# Altium PCB PCB1.PcbDoc
Units mil, origin at the board's own origin, x right, y up, seen from the top; angles counter-clockwise.
Board outline 6000 x 4000 mil, 2 copper layers (Top Layer, Bottom Layer); 21 components, 16 nets, 62 pads, 0 vias.
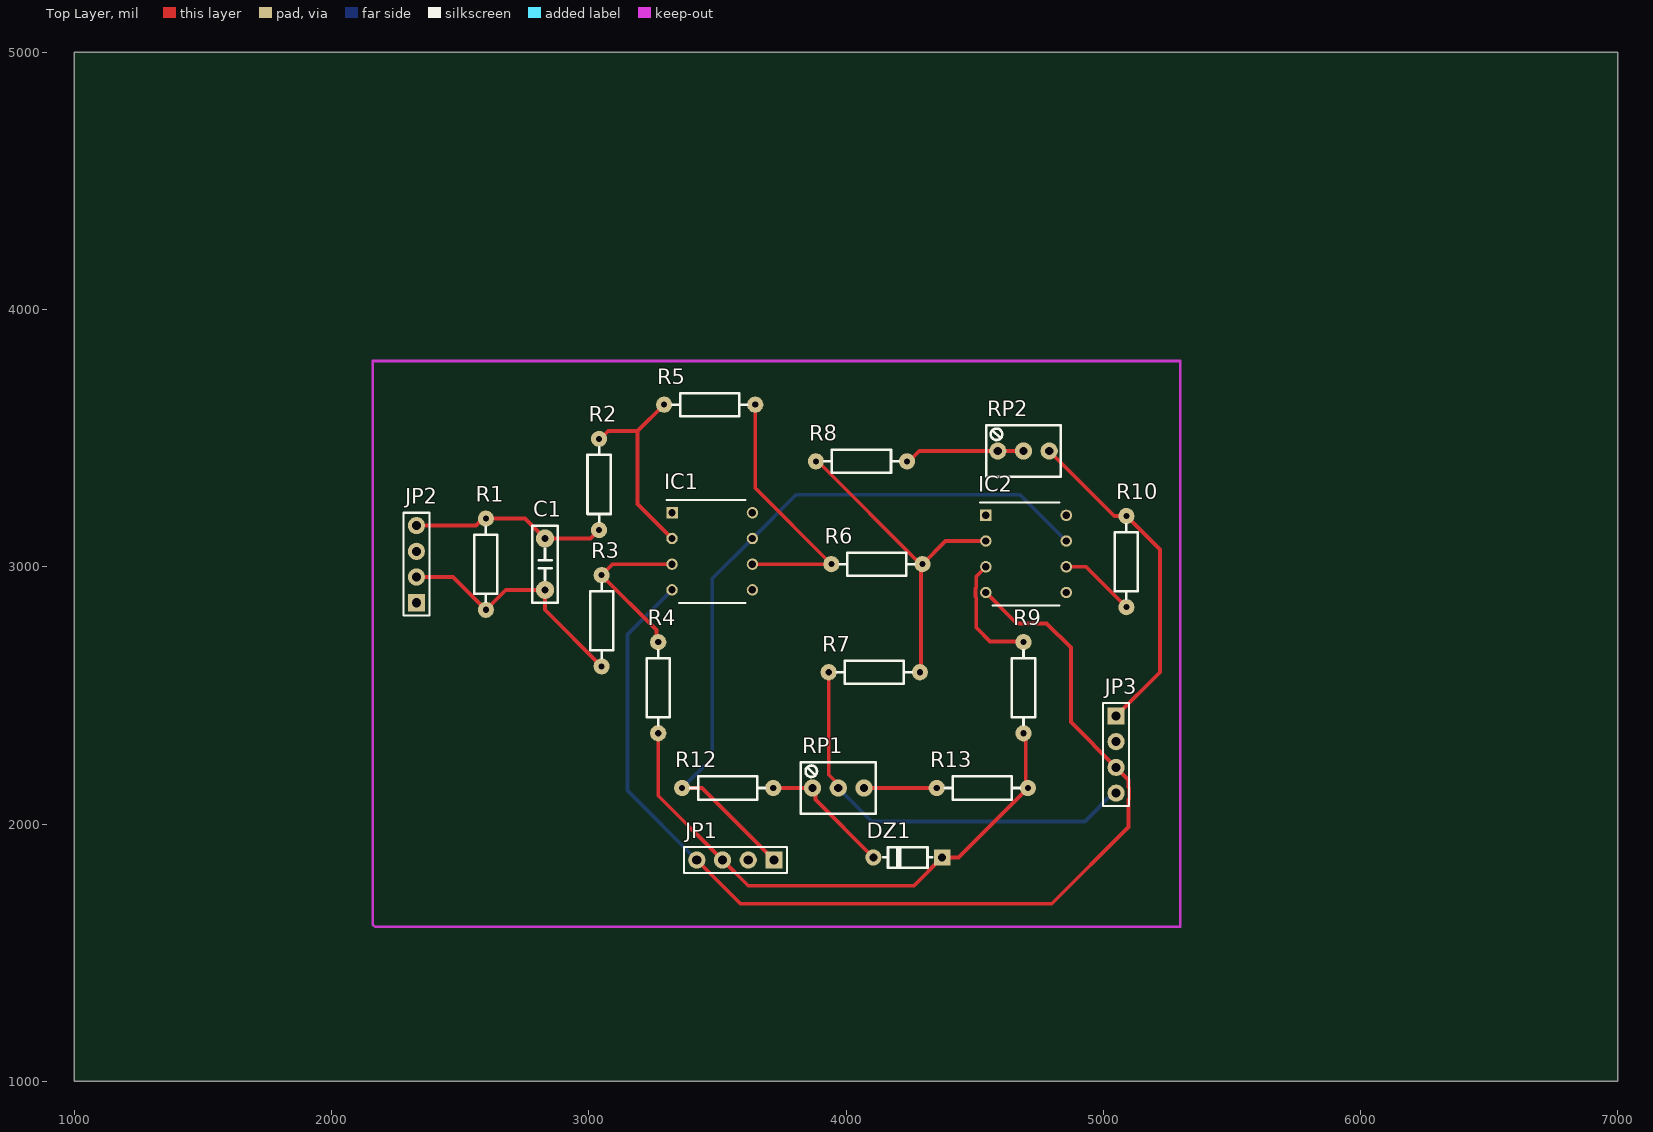
[diagram p0: Top Layer view]
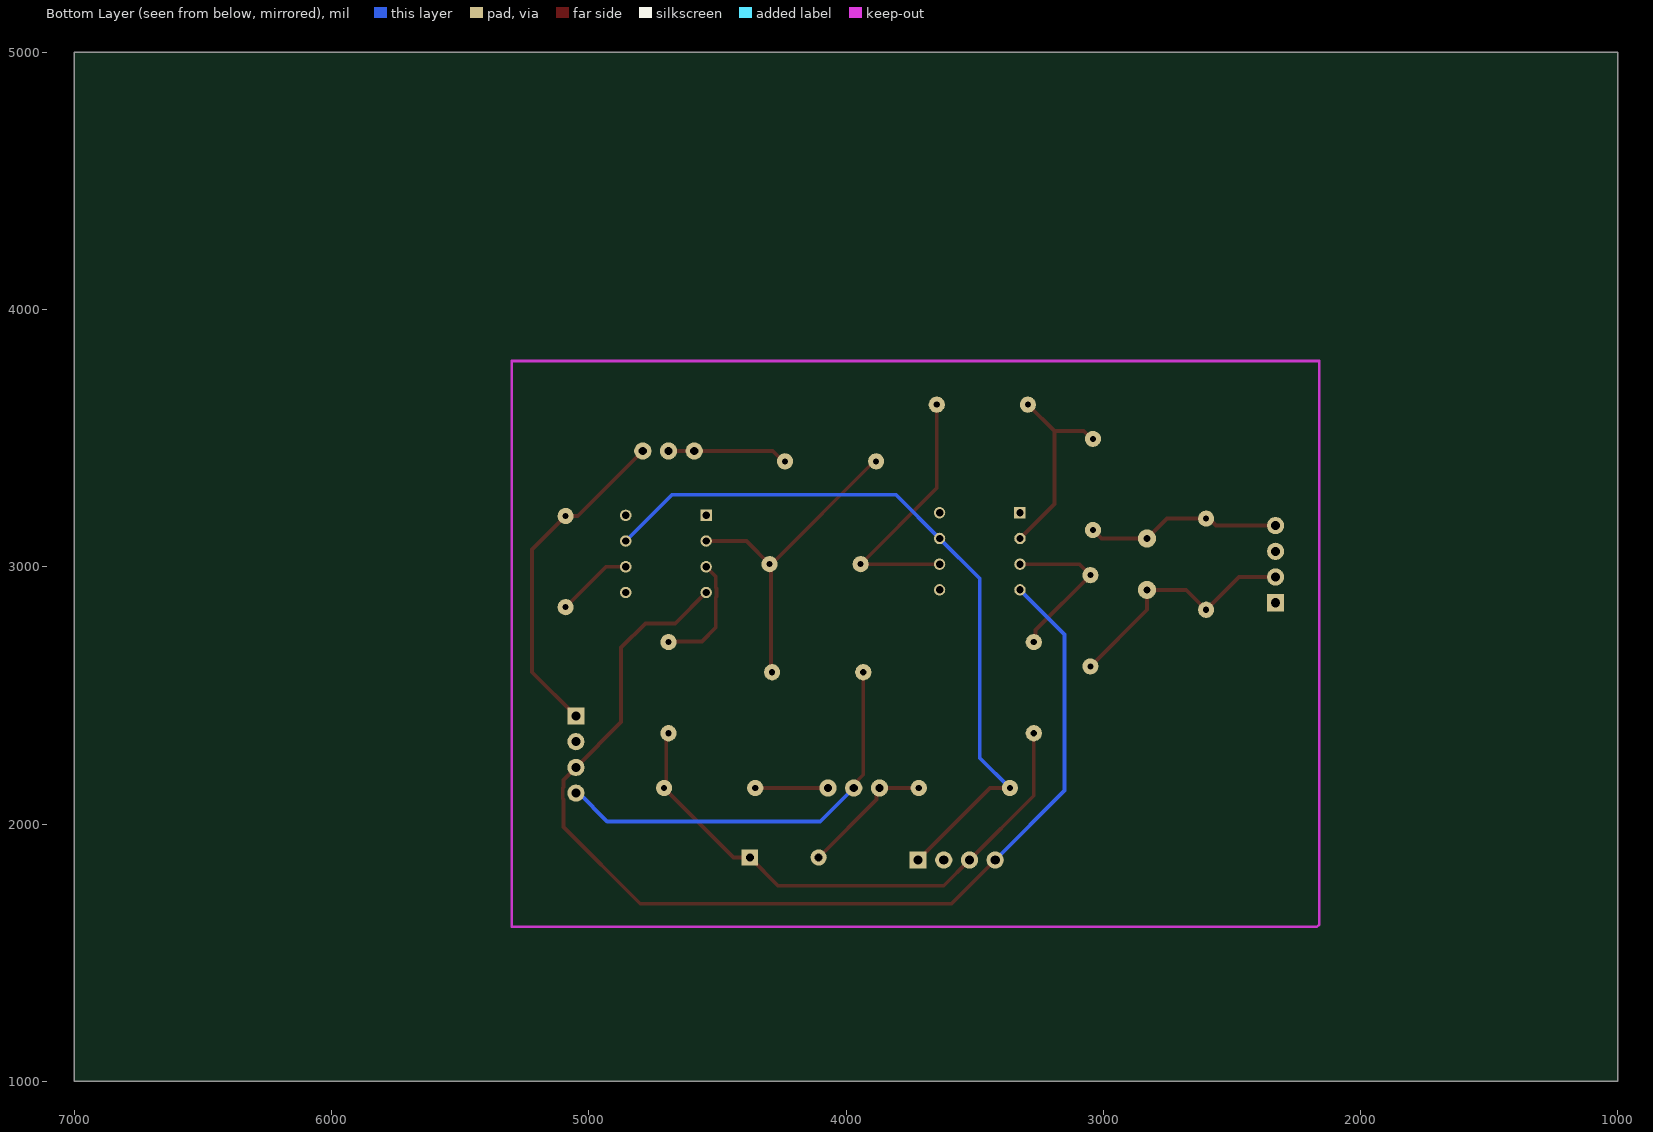
[diagram p1: Bottom Layer view, seen from below]

## Layer stack, top to bottom
Top Solder: solder mask 0.4, Solder Resist, Dk 3.5
Top Layer: signal copper 1.4
Dielectric 1: dielectric 12.6, FR-4, Dk 4.8
Bottom Layer: signal copper 1.4
Bottom Solder: solder mask 0.4, Solder Resist, Dk 3.5

## Board outline
1000,1000 7000,1000 7000,5000 1000,5000

## Design rules (kind name [scope] priority, off if disabled: settings)
Clearance [All] p1: gap=10 ignorepadtopadclearanceinfootprint=FALSE except(0: Arc-Hole Track-Hole SMDPad-Hole THPad-Hole Via-Hole Fill-Hole Poly-Hole Region-Hole Text-Hole)
PolygonConnect [All] p1: connectstyle=Relief reliefconductorwidth=10 reliefentries=4 polygonreliefangle="90 Angle" airgapwidth=10
RoutingVias [All] p1: holewidth=28 width=50 viastyle="Through Hole" minholewidth=28 minwidth=50 maxholewidth=28 maxwidth=50
SolderMaskExpansion [All] p1: expansion=4 istentingtop=FALSE
Width [All] p1: maxlimit=50 minlimit=10 preferedwidth=15 minimp=50.000000 maximp=50.000000 favimp=50.000000
30 further rules are at their usual default settings.

## Components (designator, comment, footprint, x,y, rotation, side; value= is the part's Value field where it differs from the comment)
C1 "224" MLCC5.08-A 2830,3010 r90 top
DZ1 "1N4619" DO-35 4240,1870 r180 top
IC1 "OP07CP+" DIP794W53P254L959H508Q8N 3480,3060 r0 top
IC2 "OP07CP+" DIP794W53P254L959H508Q8N 4700,3050 r0 top
JP1 "HDR-1X4" HDR2.54-LI-4P 3570,1860 r180 top
JP2 "HDR-1X4" HDR2.54-LI-4P 2330,3010 r90 top
JP3 "HDR-1X4" HDR2.54-LI-4P 5050,2270 r270 top
R1 "1K" "RS 1/4W" 2600,3010 r90 top
R2 "1K" "RS 1/4W" 3040,3320 r90 top
R3 "1K" "RS 1/4W" 3050,2790 r90 top
R4 "1K" "RS 1/4W" 3270,2530 r90 top
R5 "1K" "RS 1/4W" 3470,3630 r0 top
R6 "1K" "RS 1/4W" 4120,3010 r0 top
R7 "1K" "RS 1/4W" 4110,2590 r0 top
R8 "1K" "RS 1/4W" 4060,3410 r0 top
R9 "1K" "RS 1/4W" 4690,2530 r90 top
R10 "1K" "RS 1/4W" 5090,3020 r90 top
R12 "1K" "RS 1/4W" 3540,2140 r0 top
R13 "1K" "RS 1/4W" 4530,2140 r180 top
RP1 "10K" 3266Y 3970,2140 r0 top
RP2 "12K" 3266Y 4690,3450 r0 top

## Footprints (in the part's own frame and the unit in brackets; to place one, negate y for a bottom-side part, rotate by r counter-clockwise, add the part's x,y. Pads: shape width x height; smd on the part's side, far side on the other; paste and mask are expansions set on the pad)
3266Y [mm] "长：7mm，宽：4.8mm，高：7.5mm"
  round 1.7 hole 0.8: 1(-2.54,0) 2(0,0) 3(2.54,0)
  silkscreen extent -3.68,-2.54 3.68,2.54, body extent -3.5,-2.4 3.5,2.4, height 8.03
DIP794W53P254L959H508Q8N [mm]
  rect 1.13x1.13 hole 0.73: 1(-3.97,3.81)
  round 1.13 hole 0.73: 2(-3.97,1.27) 3(-3.97,-1.27) 4(-3.97,-3.81) 5(3.97,-3.81) 6(3.97,-1.27) 7(3.97,1.27) 8(3.97,3.81)
  silkscreen extent -4.53,-5.08 3.3,5.08, body extent -4.1,-4.79 4.1,4.79, height 5.08
DO-35 [mm] "1.8*6.8mm(直径，脚距）"
  rect 1.6x1.6 hole 0.8: 1(-3.4,0)
  round 1.6 hole 0.8: 2(3.4,0)
  silkscreen extent -2.41,-1.02 2.41,1.02, body extent -3.65,-0.9 3.65,0.9, height 1.85
HDR2.54-LI-4P [mm] "排针，4脚"
  rect 1.7x1.7 hole 0.9: 1(-3.81,0)
  round 1.7 hole 0.9: 2(-1.27,0) 3(1.27,0) 4(3.81,0)
  silkscreen extent -5.08,-1.27 5.08,1.27, body extent -5.08,-1.27 5.08,1.27, height 8.5
MLCC5.08-A [mm] "独石电容，脚距5.08mm"
  round 1.8 hole 0.7: 1(-2.54,0) 2(2.54,0)
  silkscreen extent -3.81,-1.27 3.81,1.27, body extent -2.79,-1 2.79,1, height 3.71
"RS 1/4W" [mm] "直插色环电阻，脚距9mm，直径2.3mm"
  round 1.6 hole 0.6: 1(-4.5,0) 2(4.5,0)
  silkscreen extent -3.68,-1.14 3.68,1.14, body extent -4.72,-1.16 4.73,1.16, height 2.32

## Part data
C1: library part C-MLCC, "独石电容", BOM名称=独石电容, 学习资源=www.ooocke.com, 版权归属=源创客
DZ1: "3V/0.5W稳压管", BOM名称=3V/0.5W稳压管, 学习资源=www.ooocke.com, 版权归属=源创客
IC1 IC2: "Integrated Circuit", Manufacturer_Name="Texas Instruments", Mouser Part Number=N/A, Height=5.08mm, Manufacturer_Part_Number=OP07CP+, Mouser Price/Stock=https://www.mouser.co.uk/ProductDetail/Texas-Instruments/OP07CP%2b?qs=iZ8gpeFYjbuxAroH12iSPg%3D%3D
JP1 JP2 JP3: library part "Header 4", "4P接插件", BOM名称=4P接插件, 学习资源=www.ooocke.com, 版权归属=源创客
R1 R2 R3 R4 R5 R6 R7 R8 R9 R10 R12 R13: library part R-CRR, "直插色环电阻", BOM名称=色环电阻, 学习资源=www.ooocke.com, 版权归属=源创客
RP1 RP2: library part RP-ID, "插件单联电位器", BOM名称=插件电位器, 学习资源=www.ooocke.com, 版权归属=源创客

## Nets (pads, with @x,y where several pads share a name; then routed paths per layer and width w, separated by ;. In a path a pad name is that pad's centre, name@x,y a point inside that pad or via, vN(x,y) a via of type N, cw(c..) or ccw(c..) an arc to the next point about the centre after c; other vN are vias at no path point)
GND: DZ1.1 JP1.3 R4.1 R9.1 R13.1 | length 2195.3
  Top Layer w15: R4.1 3270,2110 JP1.3 3620,1760 4263.86,1760 DZ1.1 ; DZ1.1@4380,1870 4437.17,1870 R13.1 ; R9.1 4698.58,2344.25 4698.58,2151.42 R13.1@4708.58,2141.42
NetC1_1: C1.1 JP2.2 R1.1 R3.1 | length 970
  Top Layer w15: JP2.2 2472.83,2960 2592.83,2840 R1.1@2600,2840 ; R1.1 2677.17,2910 C1.1 2830,2832.83 R3.1
NetC1_2: C1.2 JP2.4 R1.2 R2.1 | length 768
  Top Layer w15: JP2.4 2561.41,3160 2591.41,3190 R1.2@2600,3190 ; R1.2 2752.83,3187.17 C1.2 3007.08,3110 R2.1@3040,3142.92
NetDZ1_2: DZ1.2 R12.2 RP1.1 | length 517.8
  Top Layer w15: R12.2@3720,2140 RP1.1 3880.89,2129.11 3880.89,2095.25 DZ1.2
NetIC1_2: IC1.2 R2.2 R5.1 | length 778.9
  Top Layer w15: R2.2 3045.76,3497.17 3075.76,3527.17 3190,3527.17 ; R5.1 3190,3527.17 ; IC1.2@3320,3110 3320,3113.7 3190,3243.7 3190,3527.17
NetIC1_3: IC1.3 R3.2 R4.2 | length 636
  Top Layer w15: R4.2@3270,2710 3263.5,2716.5 3263.5,2753.66 R3.2 3092.83,3010 IC1.3@3320,3010
NetIC1_4: IC1.4 IC2.4 JP1.4 JP3.3 | length 4316.3
  Top Layer w15: JP1.4 3590,1690 4800,1690 5098.46,1988.46 5098.46,2096.39 5100.96,2098.89 5100.96,2141.11 5098.46,2143.61 5098.46,2171.54 JP3.3 4874.18,2395.82 4874.18,2685.82 4780,2780 4663.7,2780 IC2.4
  Bottom Layer w15: IC1.4@3320,2910 3320,2906.3 3150,2736.3 3150,2130 JP1.4
NetIC1_6: IC1.6 R5.2 R6.1 | length 1045.3
  Top Layer w15: IC1.6@3640,3010 R6.1 3647.17,3305.67 R5.2
NetIC1_7: IC1.7 IC2.7 JP1.1 R12.1 | length 2921.4
  Top Layer w15: R12.1 3440,2140 JP1.1
  Bottom Layer w15: R12.1 3480,2257.17 3480,2953.7 IC1.7 3806.3,3280 4676.3,3280 IC2.7
NetIC2_2: IC2.2 R6.2 R7.2 R8.1 | length 1286.8
  Top Layer w15: R8.1 3890,3410 4290,3010 R6.2 ; R7.2@4290,2590 4292.17,2592.17 4292.17,3005 R6.2 ; IC2.2 4387.17,3100 R6.2
NetIC2_3: IC2.3 R9.2 | length 459.7
  Top Layer w15: IC2.3 4506.46,2962.76 4506.46,2918.96 4503.96,2916.46 4503.96,2883.54 4506.46,2881.04 4506.46,2763.54 4560,2710 R9.2@4690,2710
NetIC2_6: IC2.6 R10.1 | length 299.2
  Top Layer w15: IC2.6@4860,2990 4870,3000 4932.83,3000 R10.1
NetJP3_1: JP3.1 R10.2 RP2.3 | length 1306.2
  Top Layer w15: RP2.3 5042.83,3197.17 R10.2 5220,3067.17 5220,2590 JP3.1
NetJP3_4: JP3.4 R7.1 RP1.2 | length 1644.8
  Top Layer w15: R7.1 3932.83,2191.65 3970,2154.49 RP1.2
  Bottom Layer w15: RP1.2 4100,2010 4928.39,2010 5038.39,2120 JP3.4
NetR8_2: R8.2 RP2.1 RP2.2 | length 469.4
  Top Layer w15: R8.2 4244.71,3410 4284.71,3450 RP2.2
NetR13_2: R13.2 RP1.3 | length 282.8
  Top Layer w15: RP1.3 R13.2
pads on no net: IC1.1 IC1.5 IC1.8 IC2.1 IC2.5 IC2.8 JP1.2 JP2.1 JP2.3 JP3.2

## Keep-outs
Keep-Out Layer:
  lines w10: 2160,1610 2160,3800 5300,3800 5300,1600 2170,1600 2160,1610